# Altium PCB FMC_DAC_PSU.PcbDoc (part 1 of 3)
Units mil, origin at the board's own origin, x right, y up, seen from the top; angles counter-clockwise.
Board outline 748.03 x 2716.54 mil, 6 copper layers (TOP, G1, L2, L3, P4, BOTTOM), stack 50.473 mil thick; 122 components, 60 nets, 337 pads, 202 vias.
Unrouted connection lines stored in the file: 1.
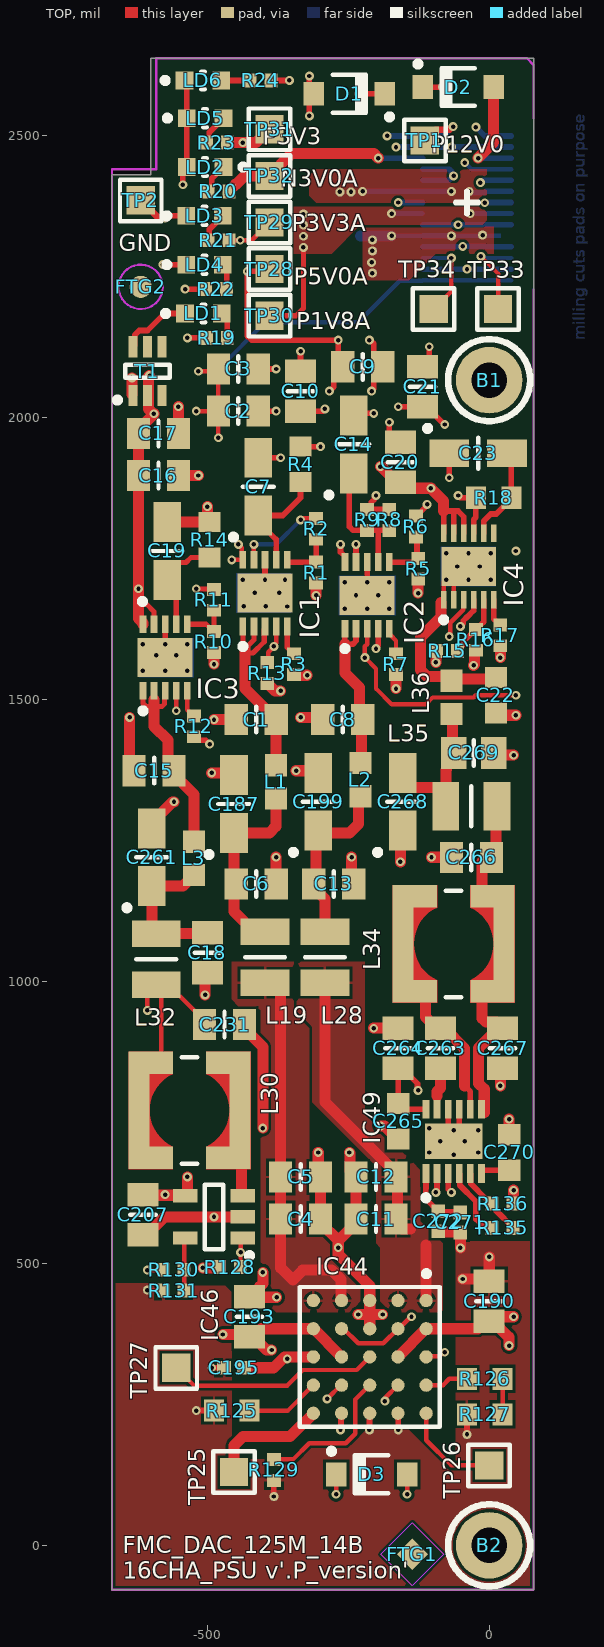
[diagram p0: TOP view]
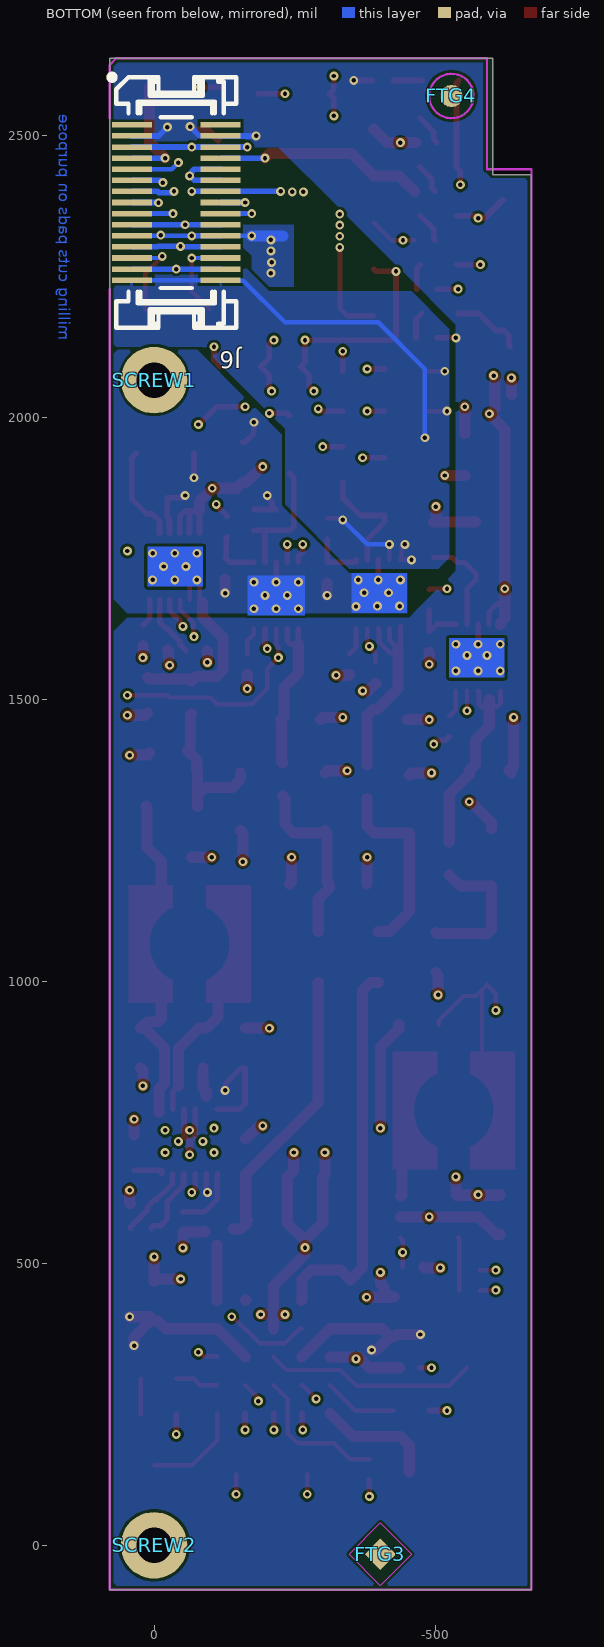
[diagram p1: BOTTOM view, seen from below]
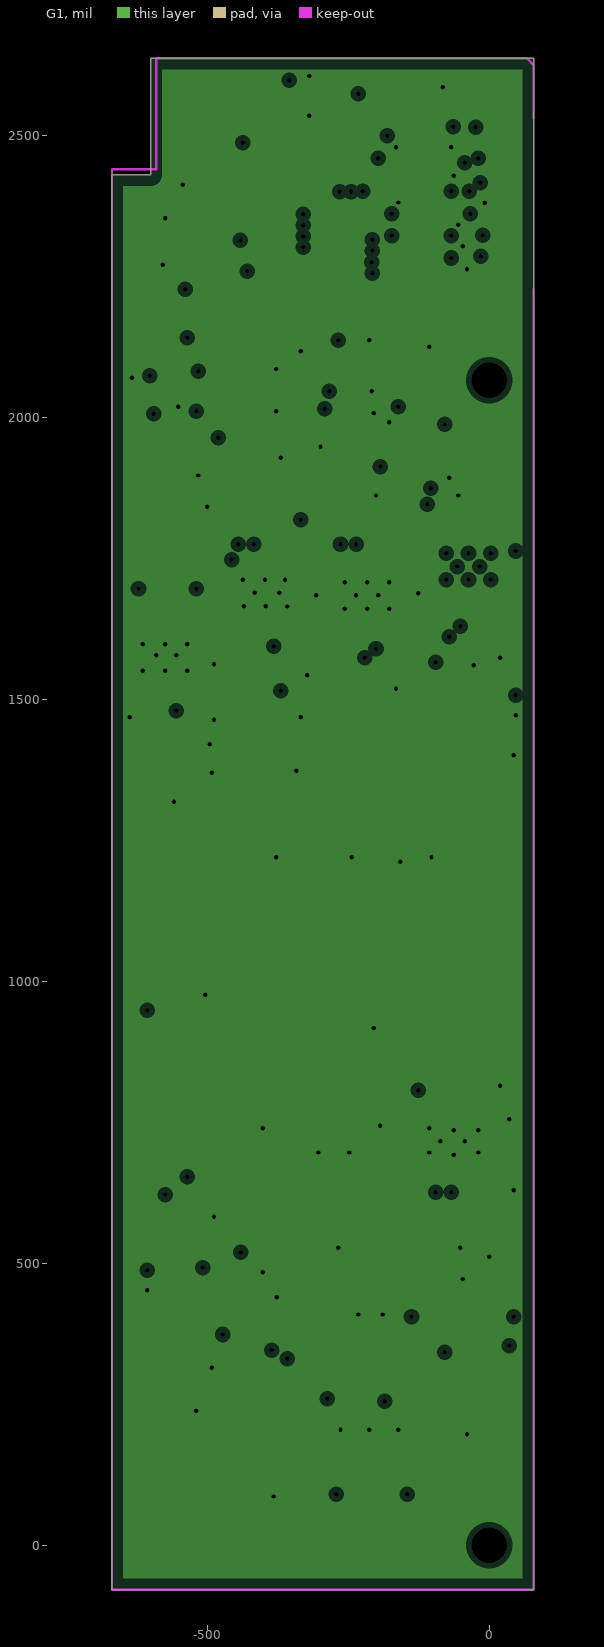
[diagram p2: G1, clearances drawn from the general rule]
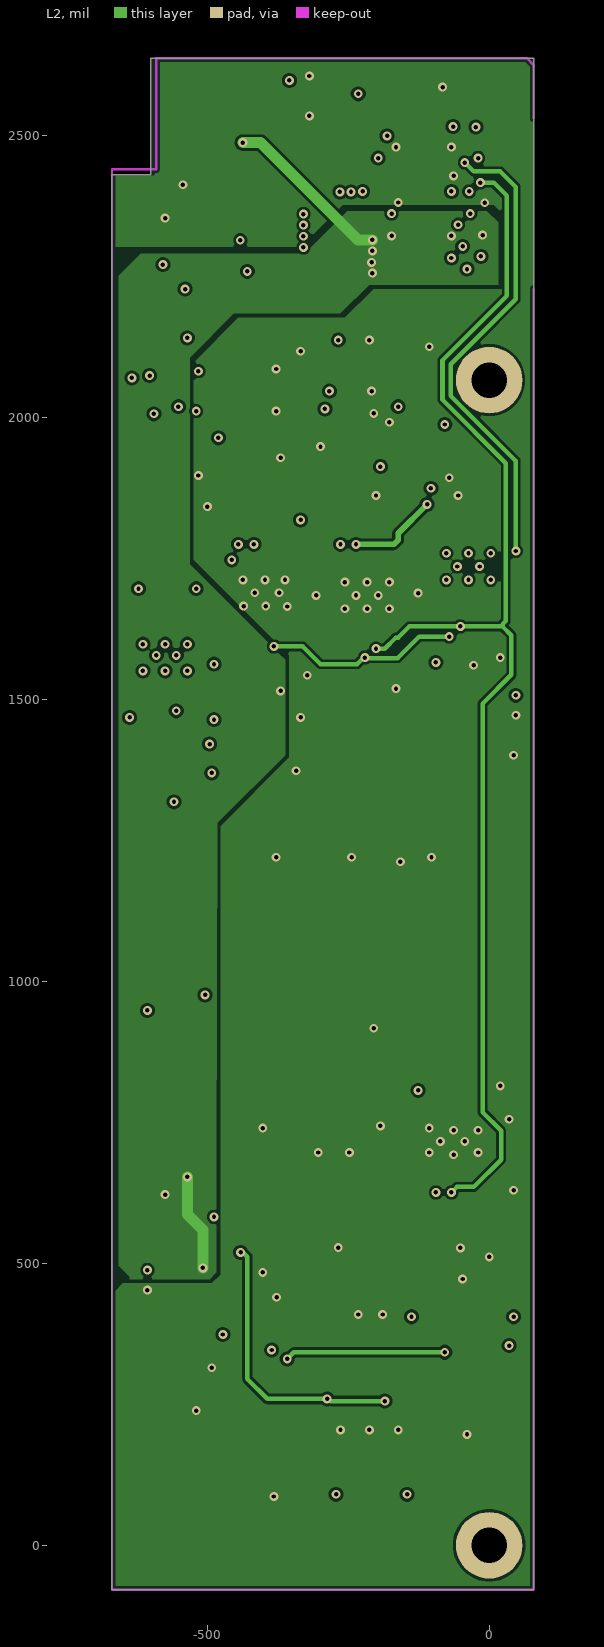
[diagram p3: L2]
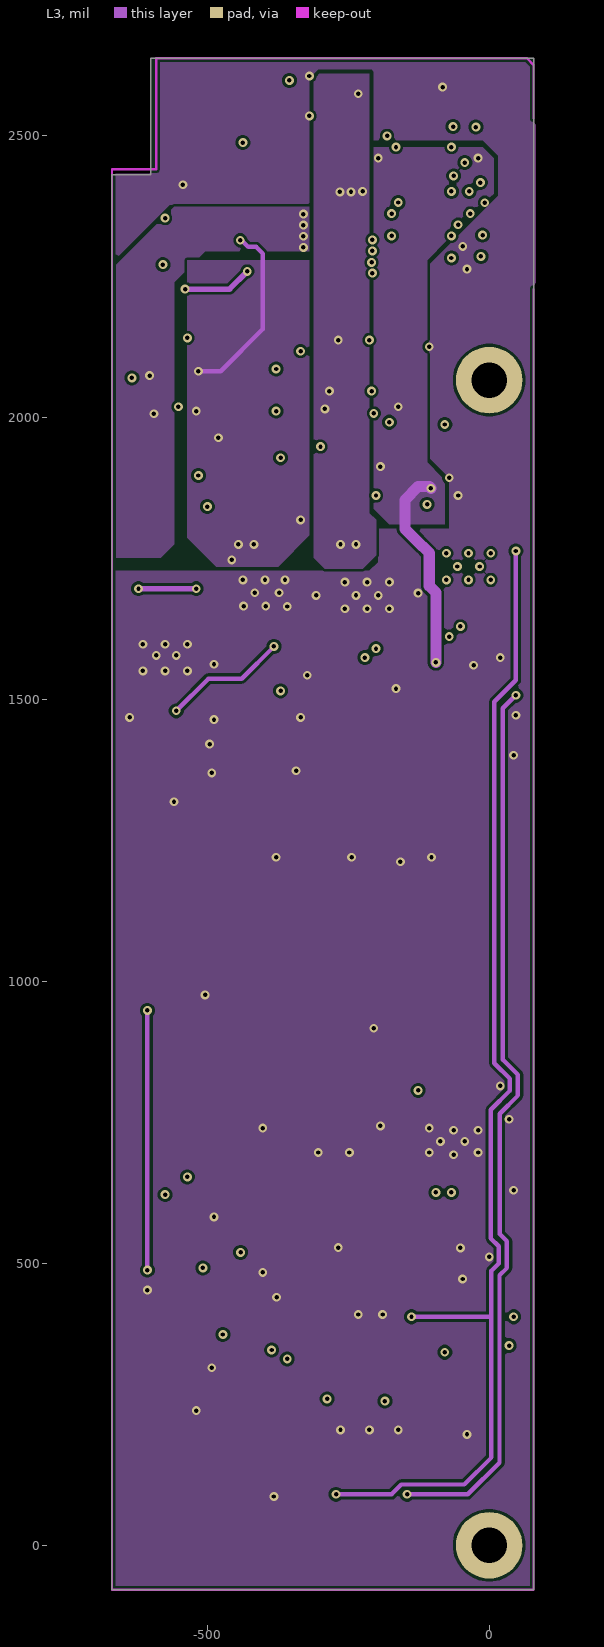
[diagram p4: L3]
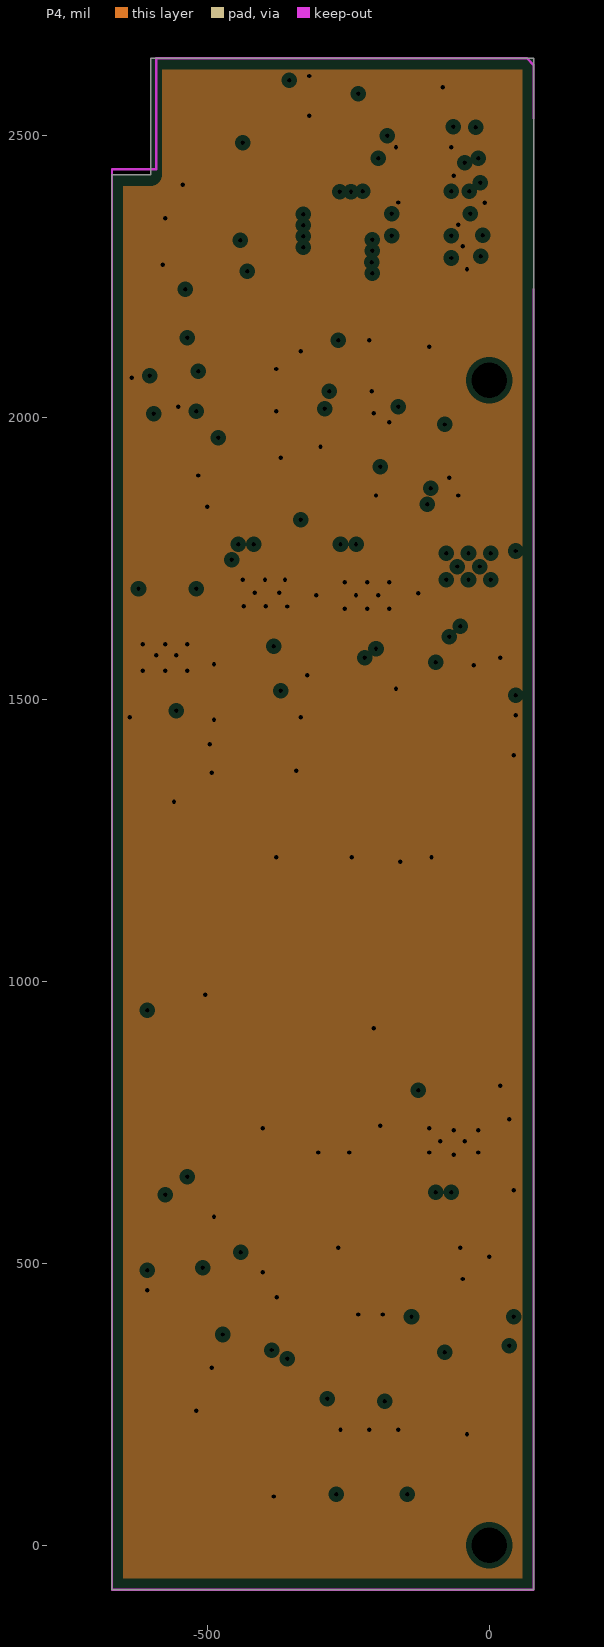
[diagram p5: P4, clearances drawn from the general rule]
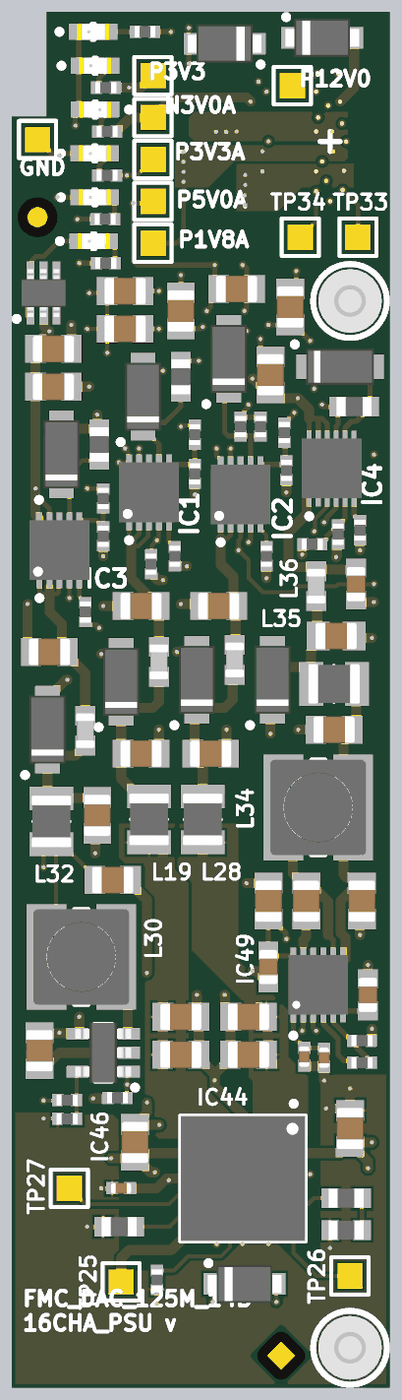
[diagram p7: 3D render of the assembled board from above, using the file's embedded part models]

## Layer stack, top to bottom
TopSolder: solder mask 0.3937, Solder Resist, Dk 3.5
TOP: signal copper 1.378
Dielectric1: prepreg 7.0866, FR-4, Dk 4.8
G1: plane copper 0.7087, net GND
Dielectric2: core 11.811, FR-4, Dk 4.8
L2: signal copper 0.7087
Dielectric 3: prepreg 7.0866, FR-4, Dk 4.8
L3: signal copper 0.7087
Dielectric 4: core 11.811, FR-4, Dk 4.8
P4: plane copper 0.7087, net GND
Dielectric5: prepreg 7.0866, FR-4, Dk 4.8
BOTTOM: signal copper 1.378
BottomSolder: solder mask 0.3937, Solder Resist, Dk 3.5

## Board outline
-669.29,-78.74 -669.29,2372.05 -669.29,2431.1 -600.39,2431.1 -600.39,2637.8 78.74,2637.8 78.74,-78.74

## Design rules (kind name [scope] priority, off if disabled: settings)
AcuteAngle [All] p1: minimum=4.50000000000000E+0001 checktracksonly=FALSE
AssemblyTestPointUsage [All] p1 off:
AssemblyTestpoint [All] p1 off: testpointundercomponent=TRUE minsize=40 maxsize=100 preferedsize=60 minholesize=0 maxholesize=40 preferedholesize=32 testpointgrid=1 usegrid=TRUE gridtolerance=0.01 allowsidetop=TRUE allowsidebottom=TRUE
Clearance [All] p1: gap=5 ignorepadtopadclearanceinfootprint=FALSE
ComponentClearance NO_DRC [InComponentClass('NO_DRC')] p1 off: gap=0 collisioncheckmode=3 verticalgap=100000 showdistances=FALSE
ComponentClearance [All] p2 off: gap=1 collisioncheckmode=3 verticalgap=100000 showdistances=FALSE
DiffPairsRouting [All] p1: maxlimit=12 minlimit=8 mostfreqgap=10 toplayer_minwidth=15 toplayer_maxwidth=15 toplayer_prefwidth=15 midlayer1_minwidth=15 midlayer1_maxwidth=15 midlayer1_prefwidth=15 midlayer2_minwidth=15 midlayer2_maxwidth=15 midlayer2_prefwidth=15 bottomlayer_minwidth=15 bottomlayer_maxwidth=15 bottomlayer_prefwidth=15 maxuncoupledlength=600
FabricationTestPointUsage TestPointUsage [All] p1 off: valid=0 allowmultiple=FALSE
FabricationTestpoint Testpoint [All] p1 off: side=3 testpointundercomponent=TRUE minsize=40 maxsize=100 preferedsize=60 minholesize=0 maxholesize=40 preferedholesize=32 testpointgrid=1 allowsidetop=TRUE allowsidebottom=TRUE usegrid=TRUE gridtolerance=0.01
FanoutControl Fanout_BGA [IsBGA] p1 off: bgadir=Out bgaviamode=Centered fanoutstyle=Auto fanoutdirection=Alternating viagrid=1 // Fanout_BGA (Default Rule)
FanoutControl Fanout_LCC [IsLCC] p2 off: bgadir=Out bgaviamode=Centered fanoutstyle=Auto fanoutdirection=Alternating viagrid=1 // Fanout_LCC (Default Rule)
FanoutControl Fanout_SOIC [IsSOIC] p3 off: bgadir=Out bgaviamode=Centered fanoutstyle=Auto fanoutdirection=Alternating viagrid=1 // Fanout_SOIC (Default Rule)
FanoutControl Fanout_Small [(CompPinCount < 5)] p4 off: bgadir=Out bgaviamode=Centered fanoutstyle=Auto fanoutdirection=OutThenIn viagrid=1 // Fanout_Small (Default Rule)
FanoutControl Fanout_Default [All] p5 off: bgadir=Out bgaviamode=Centered fanoutstyle=Auto fanoutdirection=Alternating viagrid=1 // Fanout_Default (Default Rule)
Height Height_Top [OnTop] p1 off: minheight=0 maxheight=370 prefheight=350
Height Height_Bot [OnBottom] p2 off: minheight=0 maxheight=58 prefheight=52
HoleSize [All] p1: absolutevalues=TRUE maxlimit=1000 minlimit=5.91 maxpercent=80.000 minpercent=20.000
HoleToHoleClearance [All] p1: gap=5 allowstackedmicrovias=TRUE
MinimumAnnularRing [All] p1: minimumring=3.94
MinimumSolderMaskSliver [All] p1 off: minsoldermaskwidth=1
PlaneClearance [All] p1: clearance=9.84
PlaneConnect Vias_Plane [IsVia] p1: planeconnectstyle=Direct reliefexpansion=20 reliefentries=4 reliefconductorwidth=10 reliefairgap=10
PlaneConnect [All] p2: planeconnectstyle=Relief reliefexpansion=8 reliefentries=4 reliefconductorwidth=10 reliefairgap=8
PolygonConnect Vias [IsVia] p1: connectstyle=Direct reliefconductorwidth=10 reliefentries=4 polygonreliefangle="90 Angle" airgapwidth=10
PolygonConnect [All] p2: thpad.connectstyle=Relief thpad.reliefconductorwidth=16 thpad.reliefentries=4 thpad.polygonreliefangle="90 Angle" thpad.airgapwidth=10 smdpad.connectstyle=Relief smdpad.reliefconductorwidth=5 smdpad.reliefentries=4 smdpad.polygonreliefangle="90 Angle" smdpad.airgapwidth=5 via.connectstyle=Direct via.reliefconductorwidth=16 via.reliefentries=4 via.polygonreliefangle="90 Angle" via.airgapwidth=10
RoomDefinition FMC_DAC_PSU [InComponentClass('FMC_DAC_PSU')] p1 off: confinementstyle=ConfineIn formatcopy=TRUE lockcomponents=FALSE outline -444.88,251.42 -614.17,251.42 -614.17,408.9 -444.88,408.9
RoutingCorners [All] p1 off: cornerstyle=45-Degree minsetback=100 maxsetback=100
RoutingLayers [All] p1 off: top layer_v5=TRUE mid layer 1_v5=TRUE mid layer 2_v5=TRUE bottom layer_v5=TRUE
RoutingVias [All] p1: holewidth=5.91 width=15.75 viastyle="Through Hole" minholewidth=5.91 minwidth=15.75 maxholewidth=118.11 maxwidth=196.85
ShortCircuit SMA_1 [InPadClass('SMA')] p2: allowed=TRUE
SilkToSilkClearance [All] p1 off: silktosilkclearance=2
SilkToSolderMaskClearance SilkscreenOverComponentPads [IsPad] p1 off: minsilkscreentomaskgap=2 clearancetoexposedcopper=TRUE
SolderMaskExpansion [All] p1: expansion=1 istentingtop=FALSE
ViasUnderSMD ViasUnderSMD_allow [HasFootprint('SON45P300X300X80-13N-R175X248') or  HasFootprint('SON50P300X300X80-11N-R175X248') or HasFootprint('SON50P300X300X80-13N-R160X260')] p1: allowed=TRUE
ViasUnderSMD [All] p2: allowed=FALSE
Width Width_1 [InNetClass('Buff_data')] p1 off: maxlimit=6.39 minlimit=3.74 preferedwidth=5.3 toplayer_minwidth=4.37 midlayer1_maxwidth=6.14 midlayer1_prefwidth=4.83 midlayer2_minwidth=3.86 midlayer2_maxwidth=6.32 midlayer2_prefwidth=4.98 bottomlayer_minwidth=4.37 minimp=45.000000 maximp=55.000000 favimp=50.000000
Width Width_3 [(InNet('RF1') OR InNet('RF2') OR InNet('RF3') OR InNet('RF4') OR InNet('RF5') OR InNet('RF6') OR InNet('RF7') OR InNet('EXT_CLK_IN'))] p2 off: maxlimit=5.72 minlimit=4.15 preferedwidth=5.3 toplayer_minwidth=4.73 midlayer1_maxwidth=5.33 midlayer1_prefwidth=4.83 midlayer2_minwidth=4.29 midlayer2_maxwidth=5.49 midlayer2_prefwidth=4.98 bottomlayer_minwidth=4.73 minimp=48.000000 maximp=53.000000 favimp=50.000000
Width Width_Pair_Diff [All] p3: maxlimit=19.68 minlimit=7.87 preferedwidth=11.81 checkconnectedcopper=TRUE
Width [All] p4: maxlimit=100 minlimit=3 preferedwidth=10 toplayer_maxwidth=20 midlayer2_maxwidth=20 minimp=45.000000 maximp=110.000000 favimp=100.000000 checkconnectedcopper=TRUE
9 further rules are at their usual default settings.

## Classes and differential pairs
pad class Direc: J3-37 J3-38
pad class SMA: J7-2

## Components (designator, comment, footprint, x,y, rotation, side; value= is the part's Value field where it differs from the comment)
B1 "Plated Hole" c300h160 0,2066.93 r0 top
B2 "Plated Hole" c300h160 0,0 r0 top
C1 "22uF" CAPC2012X135N -413.39,1464.57 r0 top
C2 "22uF" CAPC2012X135N -444.88,2011.81 r180 top
C3 "22uF" CAPC2012X135N -444.88,2086.61 r180 top
C4 "22uF" CAPC2012X135N -334.65,578.74 r180 top
C5 "22uF" CAPC2012X135N -334.65,653.54 r180 top
C6 "22uF" CAPC2012X135N -413.39,1173.23 r180 top
C7 "10uF" CAPMP3216X180N -409.45,1877.95 r90 top
C8 "22uF" CAPC2012X135N -259.84,1464.57 r0 top
C9 "22uF" CAPC2012X135N -224.41,2090.55 r180 top
C10 "22uF" CAPC2012X135N -334.65,2047.24 r270 top
C11 "22uF" CAPC2012X135N -200.79,578.74 r0 top
C12 "22uF" CAPC2012X135N -200.79,653.54 r0 top
C13 "22uF" CAPC2012X135N -275.59,1173.23 r180 top
C14 "10uF" CAPMP3216X180N -240.16,1952.76 r90 top
C15 "22uF" CAPC2012X135N -594.49,1374.02 r0 top
C16 "22uF" CAPC2012X135N -586.61,1897.64 r180 top
C17 "22uF" CAPC2012X135N -586.61,1972.44 r180 top
C18 "22uF" CAPC2012X135N -500,1051.18 r90 top
C19 "10uF" CAPMP3216X180N -570.87,1763.78 r90 top
C20 "22uF" CAPC2012X135N -157.48,1921.26 r270 top
C21 "22uF" CAPC2012X135N -118.11,2055.12 r270 top
C22 "1uF" CAPC1608X87N 11.81,1507.87 r90 top
C23 "10uF" CAPMP3216X180N -19.69,1937.01 r0 top
C187 "10uF" CAPMP3216X180N -452.76,1314.96 r90 top
C190 "22uF" CAPC2012X135N 0,433.07 r270 top
C193 "22uF" CAPC2012X135N -425.2,405.51 r270 top
C195 "100nF" CAPC1005X55N -452.76,314.96 r0 top
C199 "10uF" CAPMP3216X180N -303.15,1318.9 r90 top
C207 "22uF" CAPC2012X135N -614.17,586.61 r90 top
C231 "22uF" CAPC2012X135N -469.49,923.61 r180 top
C261 "10uF" CAPMP3216X180N -598.43,1220.47 r90 top
C263 "10uF" CAPC2012X135N -86.61,881.89 r90 top
C264 "22uF" CAPC2012X135N -161.42,881.89 r270 top
C265 "2.2uF" CAPC1608X87N -161.42,751.97 r90 top
C266 "22uF" CAPC2012X135N -31.5,1220.47 r0 top
C267 "22uF" CAPC2012X135N 23.62,881.89 r90 top
C268 "10uF" CAPMP3216X180N -153.54,1318.9 r90 top
C269 "47uF" CAPC2012X140N -27.56,1405.51 r180 top
C270 "1uF" CAPC1608X87N 35.43,696.85 r270 top
C271 "100nF" CAPC1005X55N -51.18,572.83 r90 top
C272 "100nF" CAPC1005X55N -90.55,574.8 r90 top
D1 "PMEG6020ER" SODFL3517X110N -248.03,2574.8 r180 top
D2 "PMEG6020ER" SODFL3517X110N -55.12,2586.61 r0 top
D3 "PMEG6020ER" SODFL3517X110N -208.66,125.98 r0 top
FTG1 "Use only in PCB" FIDUCIAL_TOP_S100-200 -136.25,-15.75 r90 top
FTG2 "Use only in PCB" FIDUCIAL_TOP_C100-200 -618.11,2232.28 r90 top
FTG3 "Use only in PCB" FIDUCIAL_TOP_S100-200 -401.57,-15.75 r90 bottom
FTG4 "Use only in PCB" FIDUCIAL_TOP_C100-200 -527.56,2570.87 r90 bottom
IC1 "LT3045EDD#PBF" SON50P300X300X80-11N-R175X248 -397.64,1688.98 r90 top
IC2 "LT3045EDD#PBF" SON50P300X300X80-11N-R175X248 -216.54,1685.04 r90 top
IC3 "LT3045EDD#PBF" SON50P300X300X80-11N-R175X248 -574.8,1574.8 r90 top
IC4 "LT3094EDD#PBF" SON45P300X300X80-13N-R175X248 -36.42,1736.22 r90 top
IC44 "LTM4622AEY#PBF" BGA25C127P5X5_625X625X262 -211.87,334.26 r270 top
IC46 "TLV62565DBVT" SOT95P280X145-5N -488.19,582.68 r180 top
IC49 "TPS63710DRR" SON50P300X300X80-13N-R160X260 -62.99,716.54 r90 top
J6 "SlimStack™" MOLEX_52991-0308 -39.37,2381.89 r270 bottom locked
L1 "120R@100MHz" INDC1608X65N -377.95,1354.33 r90 top
L2 "120R@100MHz" INDC1608X65N -228.35,1358.27 r90 top
L3 "120R@100MHz" INDC1608X65N -523.62,1218.5 r90 top
L19 "1uH" INDC2620X100N -397.64,1043.31 r90 top
L28 "1uH" INDC2620X100N -291.34,1043.31 r90 top
L30 "2.2uH" IND_WURTH_WE-TPC_4828 -531.5,771.65 r180 top
L32 "1uH" INDC2620X100N -590.55,1039.37 r90 top
L34 "2.2uH" IND_WURTH_WE-TPC_4828 -62.99,1066.93 r0 top
L35 "1uH" INDC2620X100N -31.5,1311.02 r180 top
L36 "120R@100MHz" INDC1608X65N -66.93,1503.94 r90 top
LD1 "Green" LED_KINGBRIGHT_KPH-1608CGCK -506.89,2185.04 r0 top
LD2 "Green" LED_KINGBRIGHT_KPH-1608CGCK -503.94,2444.88 r180 top
LD3 "Green" LED_KINGBRIGHT_KPH-1608CGCK -504.92,2358.27 r0 top
LD4 "Green" LED_KINGBRIGHT_KPH-1608CGCK -504.92,2271.65 r0 top
LD5 "Green" LED_KINGBRIGHT_KPH-1608CGCK -503.94,2531.5 r0 top
LD6 "Green" LED_KINGBRIGHT_KPH-1608CGCK -507.87,2598.43 r0 top
R1 "3k6" RESC1005X40N -307.09,1725.59 r90 top
R2 "33k" RESC1005X40N -307.09,1803.15 r90 top
R3 "330" RESC1005X40N -346.46,1562.99 r90 top
R4 "33k" RESC1608X55N -334.65,1917.32 r270 top
R5 "1k6" RESC1005X40N -125.98,1732.28 r90 top
R6 "22k" RESC1005X40N -129.92,1807.09 r90 top
R7 "100" RESC1005X40N -165.35,1562.99 r90 top
R8 "100k" RESC1005X40N -177.17,1818.9 r270 top
R9 "100k" RESC1005X40N -216.54,1818.9 r270 top
R10 "2k4" RESC1005X40N -488.19,1602.36 r90 top
R11 "10k" RESC1005X40N -488.19,1677.17 r90 top
R12 "330" RESC1005X40N -523.62,1452.76 r90 top
R13 "43k" RESC1005X40N -393.7,1547.24 r270 top
R14 "18k" RESC1608X55N -496.06,1783.46 r270 top
R15 "47k" RESC1005X40N -74.8,1586.61 r180 top
R16 "5k6" RESC1005X40N -23.62,1606.3 r90 top
R17 "10k" RESC1005X40N 19.69,1614.17 r90 top
R18 "30k" RESC1608X55N 7.87,1858.27 r180 top
R19 "27k" RESC1005X40N -483.07,2141.73 r180 top
R20 "2k4" RESC1005X40N -480.31,2401.57 r0 top
R21 "2k4" RESC1005X40N -480.31,2314.96 r0 top
R22 "3k6" RESC1005X40N -484.25,2228.35 r180 top
R23 "2k4" RESC1005X40N -483.07,2488.19 r0 top
R24 "27k" RESC1005X40N -405.51,2598.43 r0 top
R125 "11k8" RESC1608X55N -456.69,239.09 r180 top
R126 "5k62" RESC1608X55N -7.87,295.28 r0 top
R127 "1k78" RESC1608X55N -7.87,232.28 r180 top
R128 "10k" RESC1005X40N -459.92,493.61 r0 top
R129 "200k" RESC1005X40N -381.89,133.86 r90 top
R130 "51k" RESC1005X40N -559.56,489 r180 top
R131 "18k" RESC1005X40N -559.56,452 r0 top
R135 "150k" RESC1005X40N 23.62,562.99 r0 top
R136 "43k" RESC1005X40N 23.62,606.3 r0 top
SCREW1 "M1.6x4" BOSSARD_B1.6X4/BN660_v 0,2066.93 r90 bottom
SCREW2 "M1.6x4" BOSSARD_B1.6X4/BN660_v 0,0 r90 bottom
T1 "PMGD280UN" SOT65P210X110-6N -606.3,2082.68 r90 top
TP1 "Test Point" TPS127 -114.17,2492.13 r0 top
TP2 "Test Point" TPS127 -618.11,2385.83 r0 top
TP25 "Test Point" TPS127 -452.76,129.92 r270 top
TP26 "Test Point" TPS127 0,141.73 r270 top
TP27 "Test Point" TPS127 -555.12,314.96 r270 top
TP28 "Test Point" TPS127 -389.76,2263.78 r270 top
TP29 "Test Point" TPS127 -389.76,2346.46 r270 top
TP30 "Test Point" TPS127 -389.76,2181.1 r90 top
TP31 "Test Point" TPS127 -389.76,2511.81 r180 top
TP32 "Test Point" TPS127 -389.76,2429.13 r90 top
TP33 "Test Point" TPS127 15.75,2192.91 r180 top
TP34 "Test Point" TPS127 -98.43,2192.91 r0 top

## Footprints (in the part's own frame and the unit in brackets; to place one, negate y for a bottom-side part, rotate by r counter-clockwise, add the part's x,y. Pads: shape width x height; smd on the part's side, far side on the other; paste and mask are expansions set on the pad)
BGA25C127P5X5_625X625X262 [mm] "BGA, 1.27mm Pitch, Square; 25 Pin, 5 Columns X 5 Rows, 6.25mm X 6.25mm X 2.62mm H"
  round 0.6 smd: A1(-2.54,2.54) A2(-1.27,2.54) A3(0,2.54) A4(1.27,2.54) A5(2.54,2.54) B1(-2.54,1.27) B2(-1.27,1.27) B3(0,1.27) B4(1.27,1.27) B5(2.54,1.27) C1(-2.54,0) C2(-1.27,0) C3(0,0) C4(1.27,0) C5(2.54,0) D1(-2.54,-1.27) D2(-1.27,-1.27) D3(0,-1.27) D4(1.27,-1.27) D5(2.54,-1.27) E1(-2.54,-2.54) E2(-1.27,-2.54) E3(0,-2.54) E4(1.27,-2.54) E5(2.54,-2.54)
  silkscreen extent -3.87,-3.15 3.15,3.15, body extent -3.12,-3.12 3.13,3.13, height 2.62
BOSSARD_B1.6X4/BN660_v [mil] "M1.6 L=4mm Philips Head Machine Screw, DIN 7985A, Stainless Steel A2"
  body extent -63,-63 63,63, height 48
c300h160 [mm] "Plated Through Hole: Hole Dia.=1.6mm Pad Dia.=3mm"
  round 3 hole 1.6: 1(0,0)
  silkscreen extent -1.8,-1.8 1.8,1.8
CAPC1005X55N [mm] "Capacitor, Non-Polarized, Chip; 1.00mm L X 0.50mm W X 0.70mm H, IPC Medium Density"
  rect 0.62x0.62 smd: 1(-0.45,0) 2(0.45,0)
  body extent -0.52,-0.27 0.53,0.28, height 0.55
CAPC1608X87N [mm] "Chip Capacitor, Body 1.6x0.8mm IPC Medium Density"
  rect 0.95x1 smd: 1(-0.8,0) 2(0.8,0)
  body extent -0.87,-0.47 0.88,0.48, height 0.87
CAPC2012X135N [mm] "Chip Capacitor, Body 2.0x1.25mm, IPC Medium Density"
  rect 1.05x1.4 smd: 1(-0.9,0) 2(0.9,0)
  silkscreen extent 0,-0.58 0,0.58, body extent -1.05,-0.67 1.05,0.68, height 1.25
CAPC2012X140N [mm] "Chip Capacitor, Body 2.0x1.25mm, IPC Medium Density"
  rect 1.15x1.45 smd: 1(-0.9,0) 2(0.9,0)
  silkscreen extent 0,-0.58 0,0.58, body extent -1.05,-0.67 1.05,0.68, height 1.3
CAPMP3216X180N [mm] "Capacitor, Polarized, Molded  Body 3.2x1.6mm, IPC Medium Density"
  rect 1.8x1.25 smd: 1(-1.3,0) 2(1.3,0)
  silkscreen extent -2.4,-0.7 0,1.25, body extent -1.7,-0.9 1.7,0.9, height 1.6
FIDUCIAL_TOP_C100-200 [mm] "Round Fiducial Target, Top Layer, 1.0mm, Top Solder 2.0mm, Keepout =2.0mm"
  round 1 smd paste-0.51 mask+0.5: FTG2(0,0)
  TOP keep-out circle w0.1: c0,0 r1
FIDUCIAL_TOP_S100-200 [mm] "Square Fiducial Target, Top Layer, 1.0mm, Top Solder 2.0mm, Keepout =2.0mm"
  rect 1x1 smd rot 45 paste-0.51 mask+0.5: 1(0,0)
  TOP keep-out region: 1.414,0 0,-1.414 -1.414,0 0,1.414
IND_WURTH_WE-TPC_4828 [mm] "Shielded Tiny Power Inductor, Body 4.8x4.8mm"
  rect 0.95x5.3 smd: 1(-2.275,0) 2(2.275,0)
  rect 1.05x1.014 smd: 1(-1.275,2.143) 1(-1.275,-2.143) 2(1.275,2.143) 2(1.275,-2.143)
  TOP region: 2.75,-2.65 0.75,-2.65 0.75,-1.636 1.394,-1.138 1.753,-0.407 1.753,0.407 1.394,1.138 0.75,1.636 0.75,1.636 0.75,2.65 2.75,2.65
  TOP region: -2.75,-2.65 -0.75,-2.65 -0.75,-1.636 -1.394,-1.138 -1.753,-0.407 -1.753,0.407 -1.394,1.138 -0.75,1.636 -0.75,1.636 -0.75,2.65 -2.75,2.65
  TOP region: 0.75,-2.65 2.75,-2.65 2.75,2.65 0.75,2.65 0.75,1.636 1.394,1.138 1.753,0.407 1.753,-0.407 1.394,-1.138 0.75,-1.636 0.75,-1.636
  silkscreen extent -0.35,-2.4 0.35,2.4, body extent -2.4,-2.4 2.4,2.4, height 2.8
INDC1608X65N [mm] "Chip Inductor, 2-Leads, EIA 0603, Metric 1608, Body 1.6x0.8mm, IPC Medium Density"
  rect 1x1 smd: 1(-0.75,0) 2(0.75,0)
  body extent -0.87,-0.47 0.88,0.48, height 0.65
INDC2620X100N [mm] "Chip Inductor, EIA 1008, Metric 2520, Body 2.60mm L X 2.00mm W X 1.00mm H, IPC Medium Density"
  rect 1.2x2.2 smd: 1(-1.15,0) 2(1.15,0)
  silkscreen extent 0,-0.9 0,0.9, body extent -1.3,-1 1.3,1, height 1
LED_KINGBRIGHT_KPH-1608CGCK [mm] "SMT Green LED, Case 0603, Body L 1.6 x W 0.8mm H 0.65mm"
  rect 0.8x0.8 smd: 1(-0.825,0) 2(0.825,0)
  silkscreen extent -1.82,-0.4 0.08,0.4, body extent -0.8,-0.4 0.8,0.4, height 0.65
MOLEX_52991-0308 [mm] "0.50mm Pitch SlimStack™ Dual Row 30 Circuits Surface Mount Vertical Receptacle (3.00 and 4.00mm Stacking Heights)"
  rect 0.25x1.8 smd: 1(-3.5,-2) 2(-3.5,2) 3(-3,-2) 4(-3,2) 5(-2.5,-2) 6(-2.5,2) 7(-2,-2) 8(-2,2) 9(-1.5,-2) 10(-1.5,2) 11(-1,-2) 12(-1,2) 13(-0.5,-2) 14(-0.5,2) 15(0,-2) 16(0,2) 17(0.5,-2) 18(0.5,2) 19(1,-2) 20(1,2) 21(1.5,-2) 22(1.5,2) 23(2,-2) 24(2,2) 25(2.5,-2) 26(2.5,2) 27(3,-2) 28(3,2) 29(3.5,-2) 30(3.5,2)
  silkscreen extent -5.77,-3.01 5.65,2.7, body extent -5.65,-2.7 5.65,2.7, height 2.32
RESC1005X40N [mm] "Chip Resistor, EIA 0402, Metric 1005, Body 1.0x0.5mm, IPC Medium Density"
  rect 0.58x0.62 smd: 1(-0.47,0) 2(0.47,0)
  body extent -0.52,-0.27 0.53,0.28, height 0.4
RESC1608X55N [mm] "Chip Resistor, EIA 0603, Metric 1608, Body 1.6x0.8mm, IPC Medium Density"
  rect 0.9x1 smd: 1(-0.8,0) 2(0.8,0)
  body extent -0.87,-0.47 0.88,0.48, height 0.55
SODFL3517X110N [mm] "SODFL Diode (SOD123W); 2.60mm W X 1.70mm L X 1.10mm H body, IPC Medium Density"
  rect 0.92x1.08 smd: 1(-1.6,0) 2(1.6,0)
  silkscreen extent -1.93,-0.85 0.75,1.16, body extent -1.85,-0.95 1.85,0.95, height 1.1
SON45P300X300X80-13N-R175X248 [mm] "SON, 0.45mm Pitch; 12 Pin, 3.00mm W X 3.00mm L X 0.80mm H Body (w/Thermal tab 1.75 x 2.48mm), IPC Medium Density"
  rect 0.8x0.25 smd: 1(-1.5,1.125) 2(-1.5,0.675) 3(-1.5,0.225) 4(-1.5,-0.225) 5(-1.5,-0.675) 6(-1.5,-1.125) 7(1.5,-1.125) 8(1.5,-0.675) 9(1.5,-0.225) 10(1.5,0.225) 11(1.5,0.675) 12(1.5,1.125)
  rect 1.75x2.45 smd paste-0.37: 13(0,0)
  silkscreen extent -2.52,1 -2.28,1.25, body extent -1.5,-1.5 1.5,1.5, height 0.8
SON50P300X300X80-11N-R175X248 [mm] "SON, 0.50mm Pitch; 10-pin, 3.00mm W  X 3.00mm L X 0.80mm H Body, (w/thermal tab 1.75 X 2.48 mm), IPC Medium Density"
  rect 0.8x0.3 smd: 1(-1.5,1) 2(-1.5,0.5) 3(-1.5,0) 4(-1.5,-0.5) 5(-1.5,-1) 6(1.5,-1) 7(1.5,-0.5) 8(1.5,0) 9(1.5,0.5) 10(1.5,1)
  rect 1.75x2.48 smd: 11(0,0)
  silkscreen extent -2.52,0.87 -2.28,1.12, body extent -1.5,-1.5 1.5,1.5, height 0.8
SON50P300X300X80-13N-R160X260 [mm] "SON, 0.50mm Pitch, 12-Pin, 3.00mm W  X 3.00mm L X 0.80mm Height, (w/Thermal Tab 1.6 X 2.6 mm), IPC Medium Density"
  rect 0.85x0.3 smd: 1(-1.45,1.25) 2(-1.45,0.75) 3(-1.45,0.25) 4(-1.45,-0.25) 5(-1.45,-0.75) 6(-1.45,-1.25) 7(1.45,-1.25) 8(1.45,-0.75) 9(1.45,-0.25) 10(1.45,0.25) 11(1.45,0.75) 12(1.45,1.25)
  rect 1.6x2.6 smd: 13(0,0)
  silkscreen extent -2.66,1.12 -2.42,1.37, body extent -1.5,-1.5 1.5,1.5, height 0.8
SOT65P210X110-6N [mm] "SOT363, SC70-6, SOT, 0.65mm Pitch, 6 Pin, 1.25mm W X 2.00mm L X 1.10mm H, IPC Medium Density"
  rect 0.95x0.4 smd: 1(-1.1,0.65) 2(-1.1,0) 3(-1.1,-0.65) 4(1.1,-0.65) 5(1.1,0) 6(1.1,0.65)
  silkscreen extent -1.42,-1 0.3,1.47, body extent -1.2,-1.1 1.2,1.1, height 1.1
SOT95P280X145-5N [mm] "SOT, 0.95mm pitch; 5 pin, 1.60mm W X 2.90mm L X 1.45mm H body, IPC Medium Density"
  rect 1.1x0.6 smd: 1(-1.3,0.95) 2(-1.3,0) 3(-1.3,-0.95) 4(1.3,-0.95) 5(1.3,0.95)
  silkscreen extent -1.73,-1.45 0.43,1.87, body extent -1.4,-1.5 1.4,1.5, height 1.45
TPS127 [mil] "1.27 x  1.27mm SMD Test Point Area"
  rect 50x50 smd paste-50: 1(0,0)
  silkscreen extent -37,-37 37,37

## Part data
B1 B2: library part PLATED_HOLE1.6_PAD3.0, "Single Terminal Socket", Author="CERN DEM JMW", ComponentHeight=0mm, Component Type="Standard (No BOM)", CreateDate=05.11.2009, Family="Plated Hole", HelpURL=Undefined, LatestRevisionDate=05.11.2009, Mounted=No, PackageDescription="Plated Through Hole: Hole Dia.=1.6mm Pad Dia.=3.0mm", Part Description="Plated Through Hole: Hole Dia.=1.6mm Pad Dia.=3.0mm", Part Number=PLATED_HOLE1.6_PAD3.0, Pin Count=1, Sense=No, SMD=No, Socket=No, Status=None
C1 C2 C3 C4 C5 C6 C8 C9 C10 C11 C12 C13 C15 C16 C17 C18 C20 C21 C190 C193 C207 C231 C264 C266 C267: library part CC0805_22UF_16V_10%_X5R, "Non-polarised capacitor", Case=0805, Manufacturer=GENERIC, Manufacturer1 ComponentHeight=1.35mm, Manufacturer1 Example=TDK, Manufacturer1 Part Number=C2012X5R1C226KT, Tolerance=±10%, Voltage=16V, Author="CERN DEM JLC", Component Type=Standard, CreateDate=25.10.2012, HelpURL=\\cern.ch\dfs\Applications\Altium\Datasheets\CC0805_X5R_TDK_C.pdf, LatestRevisionDate=25.10.2012, Manufacturer Part Number=CC0805_22UF_16V_10%_X5R, Mounted=Yes, Part Description="SMD Multilayer Chip Ceramic Capacitor", Part Number=CC0805_22UF_16V_10%_X5R, Pin Count=2, Sense=No, SMD=Yes, Socket=No, Status=Preferred, TC=X5R
C7 C14 C19 C23: library part CTE3216-18_10UF_16V_20%_AVX_TCJ, "Polarised capacitor", Case=A, Manufacturer=AVX, Manufacturer Part Number=TCJA106M016R0200, Tolerance=±20%, Voltage=16V, Author="CERN DEM JLC", Component Type=Standard, ComponentHeight=1.8mm, CreateDate=29.03.2012, HelpURL=\\cern.ch\dfs\Applications\Altium\Datasheets\CTE_AVX_TCJ.pdf, LatestRevisionDate=29.03.2012, Mounted=Yes, Part Description="ESR 0R200 Tantalum Solid Electrolytic Chip Capacitor with Conductive Polymer Electrode", Part Number=CTE3216-18_10UF_16V_20%_AVX_TCJ, Pin Count=2, Sense=No, SMD=Yes, Socket=No, Status=Preferred
C22: library part CC0603_1UF_25V_10%_X7R, "Non-polarised capacitor", Case=0603, Manufacturer=GENERIC, Manufacturer1 ComponentHeight=0.9mm, Manufacturer1 Example=MURATA, Manufacturer1 Part Number=GRM188R71E105KA12D, Tolerance=±10%, Voltage=25V, Author="CERN DEM JLC", Component Type=Standard, CreateDate=18.01.2011, HelpURL=\\cern.ch\dfs\Applications\Altium\Datasheets\CC0603_X7R_MURATA.pdf, LatestRevisionDate=18.01.2011, Manufacturer Part Number=CC0603_1UF_25V_10%_X7R, Mounted=Yes, Part Description="SMD Multilayer Chip Ceramic Capacitor", Part Number=CC0603_1UF_25V_10%_X7R, Pin Count=2, Sense=No, SMD=Yes, Socket=No, Status=None, TC=X7R
C187 C199 C261 C268: library part CTE3216-18_10UF_10V_10%_LESR1800, "Polarised capacitor", Case=A, Manufacturer=GENERIC, Manufacturer1 ComponentHeight=1.8mm, Manufacturer1 Example=AVX, Manufacturer1 Part Number=TPSA106K010R1800, Tolerance=±10%, Voltage=10V, Author="CERN DEM JLC", Component Type=Standard, CreateDate=05.05.2008, HelpURL=\\cern.ch\dfs\Applications\Altium\Datasheets\CTE-LESR_AVX_TPS.pdf, LatestRevisionDate=20.01.2009, Manufacturer Part Number=CTE3216-18_10UF_10V_10%_LESR1800, Mounted=Yes, Part Description="Low ESR 1R8 Solid Tantalum Chip Capacitor", Part Number=CTE3216-18_10UF_10V_10%_LESR1800, Pin Count=2, Sense=No, SMD=Yes, Socket=No, Status=Preferred
C195 C271 C272: library part CC0402_100NF_16V_10%_X5R, "Non-polarised capacitor", Case=0402, Manufacturer=GENERIC, Manufacturer1 ComponentHeight=0.55mm, Manufacturer1 Example=MURATA, Manufacturer1 Part Number=GRM155R61C104KA88D, Tolerance=±10%, Voltage=16V, Author="CERN DEM JLC", Component Type=Standard, CreateDate=10.12.2013, HelpURL=\\cern.ch\dfs\Applications\Altium\Datasheets\CC0402_X5R_MURATA_GRM.pdf, LatestRevisionDate=10.12.2013, Manufacturer Part Number=CC0402_100NF_16V_10%_X5R, Mounted=Yes, Part Description="SMD Multilayer Chip Ceramic Capacitor", Part Number=CC0402_100NF_16V_10%_X5R, Pin Count=2, Sense=No, SMD=Yes, Socket=No, Status=None, TC=X5R
C263: library part CC0805_10UF_16V_10%_X5R, "Non-polarised capacitor", Case=0805, Manufacturer=GENERIC, Manufacturer1 ComponentHeight=1.4mm, Manufacturer1 Example=KEMET, Manufacturer1 Part Number=C0805C106K4PAC, Tolerance=±10%, Voltage=16V, Author="CERN DEM JLC", Component Type=Standard, CreateDate=03.12.2007, HelpURL=\\cern.ch\dfs\Applications\Altium\Datasheets\CC1206_X5R_KEMET.pdf, LatestRevisionDate=03.12.2007, Manufacturer Part Number=CC0805_10UF_16V_10%_X5R, Mounted=Yes, Part Description="SMD Multilayer Chip Ceramic Capacitor", Part Number=CC0805_10UF_16V_10%_X5R, Pin Count=2, Sense=No, SMD=Yes, Socket=No, Status=Preferred, TC=X5R
C265: library part CC0603_2.2UF_16V_10%_X5R, "Non-polarised capacitor", Case=0603, Manufacturer=GENERIC, Manufacturer1 ComponentHeight=0.9mm, Manufacturer1 Example=YAGEO, Manufacturer1 Part Number=CC0603KRX5R7BB225, Tolerance=±10%, Voltage=16V, Author="CERN DEM JLC", Component Type=Standard, CreateDate=28.04.2011, HelpURL=\\cern.ch\dfs\Applications\Altium\Datasheets\CC0805_X5R_PHYCOMP_HC.pdf, LatestRevisionDate=28.04.2011, Manufacturer Part Number=CC0603_2.2UF_16V_10%_X5R, Mounted=Yes, Part Description="SMD Multilayer Chip Ceramic Capacitor", Part Number=CC0603_2.2UF_16V_10%_X5R, Pin Count=2, Sense=No, SMD=Yes, Socket=No, Status=Preferred, TC=X5R
C269: library part CC0805_47UF_6.3V_20%_X5R, "Non-polarised capacitor", Case=0805, Manufacturer=GENERIC, Manufacturer1 ComponentHeight=1.4mm, Manufacturer1 Example=KEMET, Manufacturer1 Part Number=C0805C476M9PACTU, Tolerance=±20%, Voltage=6.3V, Author="CERN DEM JLC", Component Type=Standard, CreateDate=16.10.2012, HelpURL=\\cern.ch\dfs\Applications\Altium\Datasheets\CC0805_X5R_KEMET.pdf, LatestRevisionDate=16.10.2012, Manufacturer Part Number=CC0805_47UF_6.3V_20%_X5R, Mounted=Yes, Part Description="SMD Multilayer Chip Ceramic Capacitor", Part Number=CC0805_47UF_6.3V_20%_X5R, Pin Count=2, Sense=No, SMD=Yes, Socket=No, Status=Preferred, TC=X5R
C270: library part CC0603_1UF_16V_10%_X7R, "Non-polarised capacitor", Case=0603, Manufacturer=GENERIC, Manufacturer1 ComponentHeight=0.9mm, Manufacturer1 Example="YAGEO PHYCOMP", Manufacturer1 Part Number=223878615663, Manufacturer Part Number=CC0603_1uF_16V_10%_X7R, Tolerance=±10%, Voltage=16V, Author="CERN DEM JLC", Component Type=Standard, CreateDate=03.12.2007, HelpURL=\\cern.ch\dfs\Applications\Altium\Datasheets\CC0603_X7R_PHYCOMP.pdf, LatestRevisionDate=17.04.2015, Mounted=Yes, Part Description="SMD Multilayer Chip Ceramic Capacitor", Part Number=CC0603_1UF_16V_10%_X7R, Pin Count=2, Sense=No, SMD=Yes, Socket=No, Status=None, TC=X7R
D1 D2 D3: "Schottky Diode", Case=SOD123, Manufacturer="NXP SEMICONDUCTORS", Power=2A, Voltage=60V, Author="CERN DEM JMW", Bonding=No, Component Type=Standard, ComponentHeight=0.65mm, CreateDate=19.06.2014, Device=PMEG6020ER, HelpURL=\\cern.ch\dfs\Applications\Altium\Datasheets\PMEG6020ER.pdf, LatestRevisionDate=19.06.2014, Manufacturer Part Number=PMEG6020ER, Mounted=Yes, PackageDescription="SODFL Diode (SOD123W); 2.60mm W X 1.70mm L X 1.10mm H body, IPC Medium Density", Part Description="MEGA Schottky Barrier Rectifier", Part Number=PMEG6020ER, Pin Count=2, PressFit=No, Sense=No, SMD=Yes, Socket=No
FTG1 FTG3: library part FIDUCIAL_TARGET_S100-200, "Fiducial Target", Author="CERN DEM JLC", Component Type="Standard (No BOM)", ComponentHeight=0mm, CreateDate=9/2/2010, Family=Fiducial, LatestRevisionDate=4/4/2012, Mounted=No, PackageDescription="Square Fiducial Target, Top Layer, 1.0mm, Top Solder 2.0mm, Keepout =2.0mm", Part Description="Square Fiducial Target, Top Layer, 1.0mm, Top Solder 2.0mm, Keepout =2.0mm", Part Number=FIDUCIAL_TARGET_S100-200, Pin Count=1, SMD=Yes, Socket=No, Status=None, Table=Pads
FTG2 FTG4: library part FIDUCIAL_TARGET_C100-200, "Fiducial Target", Author="CERN DEM JLC", Component Type="Standard (No BOM)", ComponentHeight=0mm, CreateDate=09.02.2010, Family=Fiducial, HelpURL=Undefined, LatestRevisionDate=04.04.2012, Mounted=No, PackageDescription="Round Fiducial Target, Top Layer, 1.0mm, Top Solder 2.0mm, Keepout =2.0mm", Part Description="Round Fiducial Target, Top Layer, 1.0mm, Top Solder 2.0mm, Keepout =2.0mm", Part Number=FIDUCIAL_TARGET_C100-200, Pin Count=1, Sense=No, SMD=Yes, Socket=No, Status=None
IC1 IC2 IC3: "20V, 500mA, Ultralow Noise, Ultrahigh PSRR Linear Regulator", Case=SON10, Manufacturer="LINEAR TECHNOLOGY", Author="CERN DEM JLC", Bonding=No, Component Type=Standard, ComponentHeight=0.8mm, CreateDate=07.12.2016, Device=LT3045EDD#PBF, HelpURL=\\cern.ch\dfs\Applications\Altium\Datasheets\LT3045EDD#PBF.pdf, LatestRevisionDate=07.12.2016, Manufacturer Part Number=LT3045EDD#PBF, Mounted=Yes, PackageDescription="SON, 0.50mm Pitch; 10-pin, 3.00mm W  X 3.00mm L X 0.80mm H Body, (w/thermal tab 1.75 X 2.48 mm), IPC Medium Density", Part Description="20V, 500mA, Ultralow Noise, Ultrahigh PSRR Linear Regulator", Part Number=LT3045EDD#PBF, Pin Count=11, PressFit=No, Sense=No, SMD=Yes, Socket=No
IC4: "-20V, 500mA, Ultralow Noise, Ultrahigh PSRR Negative Linear Regulator", Case=SON12, Manufacturer="LINEAR TECHNOLOGY", Author="CERN DEM JLC", Bonding=No, Component Type=Standard, ComponentHeight=0.8mm, CreateDate=12.11.2018, Device=LT3094EDD#PBF, HelpURL=\\cern.ch\dfs\Applications\Altium\Datasheets\LT3094EDD#PBF.pdf, LatestRevisionDate=12.11.2018, Manufacturer Part Number=LT3094EDD#PBF, Mounted=Yes, PackageDescription="SON, 0.45mm Pitch; 12 Pin, 3.00mm W X 3.00mm L X 0.80mm H Body (w/Thermal tab 1.75 x 2.48mm), IPC Medium Density", Part Description="-20V, 500mA, Ultralow Noise, Ultrahigh PSRR Negative Linear Regulator", Part Number=LT3094EDD#PBF, Pin Count=13, PressFit=No, Sense=No, SMD=Yes, Socket=No
IC44: "3.6V-20V To 1.5V-12V, Dual 2A or Single 4A  Ultrathin Step-Down DC/DC µModule Regulator", Case=BGA25, Manufacturer="LINEAR TECHNOLOGY", Author="CERN DEM MR", Bonding=No, ComponentHeight=2.62mm, Component Type=Standard, CreateDate=29.09.2017, Device=LTM4622AEY#PBF, HelpURL=\\cern.ch\dfs\Applications\Altium\Datasheets\LTM4622AEY#PBF.pdf, LatestRevisionDate=29.09.2017, Manufacturer Part Number=LTM4622AEY#PBF, Mounted=Yes, PackageDescription="BGA, 1.27mm Pitch, Square; 25 Pin, 5 Columns X 5 Rows, 6.25mm X 6.25mm X 2.62mm H", Part Description="3.6V-20V To 1.5V-12V, Dual 2A or Single 4A  Ultrathin Step-Down DC/DC uModule Regulator", Part Number=LTM4622AEY#PBF, Pin Count=25, PressFit=No, Sense=No, SMD=Yes, Socket=No
IC46: "1.5A High Efficiency Step-Down Converter, Adjustable Output Voltage", Case=SOT23-5, Manufacturer="TEXAS INSTRUMENTS", Author="CERN DEM JMW", Bonding=No, ComponentHeight=1.45mm, Component Type=Standard, CreateDate=29.08.2016, Device=TLV62565DBVT, HelpURL=\\cern.ch\dfs\Applications\Altium\Datasheets\TLV62565DBVT.pdf, LatestRevisionDate=29.08.2016, Manufacturer Part Number=TLV62565DBVT, Mounted=Yes, PackageDescription="SOT, 0.95mm Pitch; 5 Pin, 1.60mm W X 2.90mm L X 1.45mm H Body, IPC Medium Density", Part Description="1.5A High Efficiency Step-Down Converter, Adjustable Output Voltage", Part Number=TLV62565DBVT, Pin Count=5, PressFit=No, Sense=No, SMD=Yes, Socket=No
IC49: "-1 to -5.5VDC, 1A Output, Low Noise Synchronous Inverting Buck Converter", Case=SON12, Manufacturer="TEXAS INSTRUMENTS", Author="CERN DEM BC", Bonding=No, ComponentHeight=0.8mm, Component Type=Standard, CreateDate=11.02.2019, Device=TPS63710DRR, HelpURL=\\cern.ch\dfs\Applications\Altium\Datasheets\TPS63710DRR.pdf, LatestRevisionDate=11.02.2019, Manufacturer Part Number=TPS63710DRR, Mounted=Yes, PackageDescription="SON, 0.50mm Pitch, 12-Pin, 3.00mm W  X 3.00mm L X 0.80mm Height, (w/Thermal Tab 1.6 X 2.6 mm), IPC Medium Density", Part Description="-1 to -5.5VDC, 1A Output, Low Noise Synchronous Inverting Buck Converter", Part Number=TPS63710DRR, Pin Count=13, PressFit=No, Sense=No, SMD=Yes, Socket=No
J6: library part MOLEX_52991-0308, "Connector 30 Female", Manufacturer=MOLEX, Manufacturer Part Number=52991-0308, Author="CERN DEM JLC", ComponentHeight=2.27mm, Component Type=Standard, CreateDate=28.08.2012, Family=SlimStack™, HelpURL=\\cern.ch\dfs\Applications\Altium\Datasheets\MOLEX_52991-0308.pdf, LatestRevisionDate=28.08.2012, Mounted=Yes, Part Description="0.50mm Pitch SlimStack™ Dual Row 30 Circuits Surface Mount Vertical Receptacle (3.00 and 4.00mm Stacking Heights)", Part Number=MOLEX_52991-0308, Pin Count=30, PressFit=No, Sense=No, SMD=Yes, Socket=No, Status=None
L1 L2 L3 L36: library part IND0603_MURATA_BLM18SG121TN1D, "Inductor", Case=0603, Manufacturer=MURATA, Manufacturer Part Number=BLM18SG121TN1D, Power=3A, Resistance=0.025R, Tolerance=±25%, Author="CERN DEM JLC", Component Type=Standard, ComponentHeight=0.65mm, CreateDate=23.07.2014, HelpURL=\\cern.ch\dfs\Applications\Altium\Datasheets\IND0603_MURATA_BLM18S.pdf, LatestRevisionDate=23.07.2014, Mounted=Yes, Part Description="SMD EMIFIL Suppression Chip Ferrite Bead", Part Number=IND0603_MURATA_BLM18SG121TN1D, Pin Count=2, Sense=No, SMD=Yes, Socket=No, Status=None
L19 L28 L32 L35: library part IND1008_1UH_20%_WURTH_74479787210B, "Inductor", Case=1008, Manufacturer="WURTH ELEKTRONIK", Manufacturer Part Number=74479787210B, Power=1.95A, Resistance=0.06R, Tolerance=±20%, Author="CERN DEM JLC", ComponentHeight=1mm, Component Type=Standard, CreateDate=01.10.2014, HelpURL=\\cern.ch\dfs\Applications\Altium\Datasheets\IND_WURTH_WE-PMI_74479787210B.pdf, LatestRevisionDate=01.10.2014, Mounted=Yes, Part Description="Power Multilayer Inductor (WE-PMI Series)", Part Number=IND1008_1UH_20%_WURTH_74479787210B, Pin Count=2, Sense=No, SMD=Yes, Socket=No, Status=None
L30 L34: library part IND_2.2UH_30%_WURTH_WE-TPC_7440430022, "Inductor With Core", Manufacturer="WURTH ELEKTRONIK", Manufacturer Part Number=7440430022, Power=2.5A, Resistance=0.023R, Tolerance=±30%, Author="CERN DEM JLC", ComponentHeight=3mm, Component Type=Standard, CreateDate=19.11.2012, HelpURL=\\cern.ch\dfs\Applications\Altium\Datasheets\IND_WURTH_WE-TPC_7440430022.pdf, LatestRevisionDate=19.11.2012, Mounted=Yes, Part Description="Shielded Tiny Power Inductor (WE-TPC Series)", Part Number=IND_2.2UH_30%_WURTH_WE-TPC_7440430022, Pin Count=2, Sense=No, SMD=Yes, Socket=No, Status=None
LD1 LD2 LD3 LD4 LD5 LD6: library part LED_KINGBRIGHT_KPH-1608CGCK, "LED Green 1C 2A", Manufacturer=KINGBRIGHT, Manufacturer Part Number=KPH-1608CGCK, Author="CERN DEM JLC", Bonding=No, Color=Green, Component Type=Standard, ComponentHeight=0.65mm, CreateDate=03.07.2017, HelpURL=\\cern.ch\dfs\Applications\Altium\Datasheets\LED_KINGBRIGHT_KPH-1608CGCK.pdf, LatestRevisionDate=03.07.2017, Mounted=Yes, PackageDescription="SMT Green LED, Case 0603, Body L 1.6 x W 0.8mm H 0.65mm", Part Description="SMD Green LED, Case 1.6mmX0.8mm(0603), 0.65mm Thickness", Part Number=LED_KINGBRIGHT_KPH-1608CGCK, Pin Count=2, PressFit=No, Sense=No, SMD=Yes, Socket=No
R1 R22: library part R0402_3K6_1%_0.0625W_100PPM, "Resistor - 1%", Case=0402, Manufacturer=GENERIC, Manufacturer1 ComponentHeight=0.4mm, Manufacturer1 Example="YAGEO PHYCOMP", Manufacturer1 Part Number=232270673602L, Power=0.0625W, Tolerance=±1%, Author="CERN DEM JLC", Component Type=Standard, CreateDate=03/12/2007, HelpURL=\\cern.ch\dfs\Applications\Altium\Datasheets\R0402_Phycomp_RC0402.pdf, LatestRevisionDate=17/10/2012, Manufacturer Part Number=R0402_3K6_1%_0.0625W_100PPM, Mounted=Yes, Part Description="General Purpose Thick Film Chip Resistor", Part Number=R0402_3K6_1%_0.0625W_100PPM, Pin Count=2, PressFit=No, Sense=No, SMD=Yes, Socket=No, Status="Not Recommended", TC=±100ppm/°C
R2: library part R0402_33K_1%_0.0625W_100PPM, "Resistor - 1%", Case=0402, Manufacturer=GENERIC, Manufacturer1 ComponentHeight=0.4mm, Manufacturer1 Example="YAGEO PHYCOMP", Manufacturer1 Part Number=232270673303L, Power=0.0625W, Tolerance=±1%, Author="CERN DEM JLC", Component Type=Standard, CreateDate=03.12.2007, HelpURL=\\cern.ch\dfs\Applications\Altium\Datasheets\R0402_Phycomp_RC0402.pdf, LatestRevisionDate=17.10.2012, Manufacturer Part Number=R0402_33K_1%_0.0625W_100PPM, Mounted=Yes, Part Description="General Purpose Thick Film Chip Resistor", Part Number=R0402_33K_1%_0.0625W_100PPM, Pin Count=2, PressFit=No, Sense=No, SMD=Yes, Socket=No, Status="Not Recommended", TC=±100ppm/°C
R3 R12: library part R0402_330R_1%_0.0625W_100PPM, "Resistor - 1%", Case=0402, Manufacturer=GENERIC, Manufacturer1 ComponentHeight=0.4mm, Manufacturer1 Example="YAGEO PHYCOMP", Manufacturer1 Part Number=232270673301L, Power=0.0625W, Tolerance=±1%, Author="CERN DEM JLC", Component Type=Standard, CreateDate=03.12.2007, HelpURL=\\cern.ch\dfs\Applications\Altium\Datasheets\R0402_Phycomp_RC0402.pdf, LatestRevisionDate=17.10.2012, Manufacturer Part Number=R0402_330R_1%_0.0625W_100PPM, Mounted=Yes, Part Description="General Purpose Thick Film Chip Resistor", Part Number=R0402_330R_1%_0.0625W_100PPM, Pin Count=2, PressFit=No, Sense=No, SMD=Yes, Socket=No, Status="Not Recommended", TC=±100ppm/°C
R4: library part R0603_33k_1%_0.1W_100PPM, "Resistor - 1%", Case=0603, Manufacturer=GENERIC, Manufacturer1 ComponentHeight=0.55mm, Manufacturer1 Example="NIC COMPONENT", Manufacturer1 Part Number=NRC06F3302TRF, Manufacturer Part Number=R0603_33K_1%_0.1W_100PPM, Power=0.1W, Tolerance=±1%, Author="CERN DEM JLC", Component Type=Standard, CreateDate=03/12/2007, HelpURL=\\cern.ch\dfs\Applications\Altium\Datasheets\R0603_NIC_NRC.pdf, LatestRevisionDate=13/03/2008, Mounted=Yes, Part Description="General Purpose Thick Film Chip Resistor", Part Number=R0603_33K_1%_0.1W_100PPM, Pin Count=2, PressFit=No, Sense=No, SMD=Yes, Socket=No, Status=Preferred, TC=±100ppm/°C
R5: library part R0402_1K6_1%_0.0625W_100PPM, "Resistor - 1%", Case=0402, Manufacturer=GENERIC, Manufacturer1 ComponentHeight=0.4mm, Manufacturer1 Example="YAGEO PHYCOMP", Manufacturer1 Part Number=232270671602L, Power=0.0625W, Tolerance=±1%, Author="CERN DEM JLC", Component Type=Standard, CreateDate=03/12/2007, HelpURL=\\cern.ch\dfs\Applications\Altium\Datasheets\R0402_Phycomp_RC0402.pdf, LatestRevisionDate=17/10/2012, Manufacturer Part Number=R0402_1K6_1%_0.0625W_100PPM, Mounted=Yes, Part Description="General Purpose Thick Film Chip Resistor", Part Number=R0402_1K6_1%_0.0625W_100PPM, Pin Count=2, PressFit=No, Sense=No, SMD=Yes, Socket=No, Status="Not Recommended", TC=±100ppm/°C
R6: library part R0402_22K_1%_0.0625W_100PPM, "Resistor - 1%", Case=0402, Manufacturer=GENERIC, Manufacturer1 ComponentHeight=0.4mm, Manufacturer1 Example="YAGEO PHYCOMP", Manufacturer1 Part Number=232270672203L, Power=0.0625W, Tolerance=±1%, Author="CERN DEM JLC", Component Type=Standard, CreateDate=03.12.2007, HelpURL=\\cern.ch\dfs\Applications\Altium\Datasheets\R0402_Phycomp_RC0402.pdf, LatestRevisionDate=17.10.2012, Manufacturer Part Number=R0402_22K_1%_0.0625W_100PPM, Mounted=Yes, Part Description="General Purpose Thick Film Chip Resistor", Part Number=R0402_22K_1%_0.0625W_100PPM, Pin Count=2, PressFit=No, Sense=No, SMD=Yes, Socket=No, Status="Not Recommended", TC=±100ppm/°C
R7: library part R0402_100R_1%_0.0625W_100PPM, "Resistor - 1%", Case=0402, Manufacturer=GENERIC, Manufacturer1 ComponentHeight=0.4mm, Manufacturer1 Example="YAGEO PHYCOMP", Manufacturer1 Part Number=232270671001L, Power=0.0625W, Tolerance=±1%, Author="CERN DEM JLC", Component Type=Standard, CreateDate=03.12.2007, HelpURL=\\cern.ch\dfs\Applications\Altium\Datasheets\R0402_Phycomp_RC0402.pdf, LatestRevisionDate=17.10.2012, Manufacturer Part Number=R0402_100R_1%_0.0625W_100PPM, Mounted=Yes, Part Description="General Purpose Thick Film Chip Resistor", Part Number=R0402_100R_1%_0.0625W_100PPM, Pin Count=2, PressFit=No, Sense=No, SMD=Yes, Socket=No, Status="Not Recommended", TC=±100ppm/°C
R8 R9: library part R0402_100K_1%_0.0625W_100PPM, "Resistor - 1%", Case=0402, Manufacturer=GENERIC, Manufacturer1 ComponentHeight=0.4mm, Manufacturer1 Example="YAGEO PHYCOMP", Manufacturer1 Part Number=232270671004L, Power=0.0625W, Tolerance=±1%, Author="CERN DEM JLC", Component Type=Standard, CreateDate=03/12/2007, HelpURL=\\cern.ch\dfs\Applications\Altium\Datasheets\R0402_Phycomp_RC0402.pdf, LatestRevisionDate=17/10/2012, Manufacturer Part Number=R0402_100K_1%_0.0625W_100PPM, Mounted=Yes, Part Description="General Purpose Thick Film Chip Resistor", Part Number=R0402_100K_1%_0.0625W_100PPM, Pin Count=2, PressFit=No, Sense=No, SMD=Yes, Socket=No, Status="Not Recommended", TC=±100ppm/°C
R10 R20 R21 R23: library part R0402_2K4_1%_0.0625W_100PPM, "Resistor - 1%", Case=0402, Manufacturer=GENERIC, Manufacturer1 ComponentHeight=0.4mm, Manufacturer1 Example="YAGEO PHYCOMP", Manufacturer1 Part Number=232270672402L, Power=0.0625W, Tolerance=±1%, Author="CERN DEM JLC", Component Type=Standard, CreateDate=03/12/2007, HelpURL=\\cern.ch\dfs\Applications\Altium\Datasheets\R0402_Phycomp_RC0402.pdf, LatestRevisionDate=17/10/2012, Manufacturer Part Number=R0402_2K4_1%_0.0625W_100PPM, Mounted=Yes, Part Description="General Purpose Thick Film Chip Resistor", Part Number=R0402_2K4_1%_0.0625W_100PPM, Pin Count=2, PressFit=No, Sense=No, SMD=Yes, Socket=No, Status="Not Recommended", TC=±100ppm/°C
R11 R128: library part R0402_10K_1%_0.0625W_100PPM, "Resistor - 1%", Case=0402, Manufacturer=GENERIC, Manufacturer1 ComponentHeight=0.4mm, Manufacturer1 Example="YAGEO PHYCOMP", Manufacturer1 Part Number=232270671003L, Power=0.0625W, Tolerance=±1%, Author="CERN DEM JLC", Component Type=Standard, CreateDate=03.12.2007, HelpURL=\\cern.ch\dfs\Applications\Altium\Datasheets\R0402_Phycomp_RC0402.pdf, LatestRevisionDate=17.10.2012, Manufacturer Part Number=R0402_10K_1%_0.0625W_100PPM, Mounted=Yes, Part Description="General Purpose Thick Film Chip Resistor", Part Number=R0402_10K_1%_0.0625W_100PPM, Pin Count=2, PressFit=No, Sense=No, SMD=Yes, Socket=No, Status="Not Recommended", TC=±100ppm/°C
R13 R136: library part R0402_43K_1%_0.0625W_100PPM, "Resistor - 1%", Case=0402, Manufacturer=GENERIC, Manufacturer1 ComponentHeight=0.4mm, Manufacturer1 Example="YAGEO PHYCOMP", Manufacturer1 Part Number=232270674303L, Power=0.0625W, Tolerance=±1%, Author="CERN DEM JLC", Component Type=Standard, CreateDate=03/12/2007, HelpURL=\\cern.ch\dfs\Applications\Altium\Datasheets\R0402_Phycomp_RC0402.pdf, LatestRevisionDate=17/10/2012, Manufacturer Part Number=R0402_43K_1%_0.0625W_100PPM, Mounted=Yes, Part Description="General Purpose Thick Film Chip Resistor", Part Number=R0402_43K_1%_0.0625W_100PPM, Pin Count=2, PressFit=No, Sense=No, SMD=Yes, Socket=No, Status="Not Recommended", TC=±100ppm/°C
R14: library part R0603_18k_1%_0.1W_100PPM, "Resistor - 1%", Case=0603, Manufacturer=GENERIC, Manufacturer1 ComponentHeight=0.55mm, Manufacturer1 Example="NIC COMPONENT", Manufacturer1 Part Number=NRC06F1802TRF, Manufacturer Part Number=R0603_18K_1%_0.1W_100PPM, Power=0.1W, Tolerance=±1%, Author="CERN DEM JLC", Component Type=Standard, CreateDate=03/12/2007, HelpURL=\\cern.ch\dfs\Applications\Altium\Datasheets\R0603_NIC_NRC.pdf, LatestRevisionDate=13/03/2008, Mounted=Yes, Part Description="General Purpose Thick Film Chip Resistor", Part Number=R0603_18K_1%_0.1W_100PPM, Pin Count=2, PressFit=No, Sense=No, SMD=Yes, Socket=No, Status=Preferred, TC=±100ppm/°C
R15: library part R0402_47K_1%_0.0625W_100PPM, "Resistor - 1%", Case=0402, Manufacturer=GENERIC, Manufacturer1 ComponentHeight=0.4mm, Manufacturer1 Example="YAGEO PHYCOMP", Manufacturer1 Part Number=232270674703L, Power=0.0625W, Tolerance=±1%, Author="CERN DEM JLC", Component Type=Standard, CreateDate=03.12.2007, HelpURL=\\cern.ch\dfs\Applications\Altium\Datasheets\R0402_Phycomp_RC0402.pdf, LatestRevisionDate=17.10.2012, Manufacturer Part Number=R0402_47K_1%_0.0625W_100PPM, Mounted=Yes, Part Description="General Purpose Thick Film Chip Resistor", Part Number=R0402_47K_1%_0.0625W_100PPM, Pin Count=2, PressFit=No, Sense=No, SMD=Yes, Socket=No, Status="Not Recommended", TC=±100ppm/°C
R16: library part R0402_5K6_1%_0.0625W_100PPM, "Resistor - 1%", Case=0402, Manufacturer=GENERIC, Manufacturer1 ComponentHeight=0.4mm, Manufacturer1 Example="YAGEO PHYCOMP", Manufacturer1 Part Number=232270675602L, Power=0.0625W, Tolerance=±1%, Author="CERN DEM JLC", Component Type=Standard, CreateDate=03/12/2007, HelpURL=\\cern.ch\dfs\Applications\Altium\Datasheets\R0402_Phycomp_RC0402.pdf, LatestRevisionDate=17/10/2012, Manufacturer Part Number=R0402_5K6_1%_0.0625W_100PPM, Mounted=Yes, Part Description="General Purpose Thick Film Chip Resistor", Part Number=R0402_5K6_1%_0.0625W_100PPM, Pin Count=2, PressFit=No, Sense=No, SMD=Yes, Socket=No, Status="Not Recommended", TC=±100ppm/°C
R17: library part R0402_10k_1%_0.0625W_100PPM, "Resistor - 1%", Case=0402, Manufacturer=GENERIC, Manufacturer1 ComponentHeight=0.4mm, Manufacturer1 Example="YAGEO PHYCOMP", Manufacturer1 Part Number=232270671003L, Manufacturer Part Number=R0402_10K_1%_0.0625W_100PPM, Power=0.0625W, Tolerance=±1%, Author="CERN DEM JLC", Component Type=Standard, CreateDate=03.12.2007, HelpURL=\\cern.ch\dfs\Applications\Altium\Datasheets\R0402_Phycomp_RC0402.pdf, LatestRevisionDate=17.10.2012, Mounted=Yes, Part Description="General Purpose Thick Film Chip Resistor", Part Number=R0402_10K_1%_0.0625W_100PPM, Pin Count=2, PressFit=No, Sense=No, SMD=Yes, Socket=No, Status="Not Recommended", TC=±100ppm/°C
R18: library part R0603_30k_1%_0.1W_100PPM, "Resistor - 1%", Case=0603, Manufacturer=GENERIC, Manufacturer1 ComponentHeight=0.55mm, Manufacturer1 Example="NIC COMPONENT", Manufacturer1 Part Number=NRC06F3002TRF, Manufacturer Part Number=R0603_30K_1%_0.1W_100PPM, Power=0.1W, Tolerance=±1%, Author="CERN DEM JLC", Component Type=Standard, CreateDate=03/12/2007, HelpURL=\\cern.ch\dfs\Applications\Altium\Datasheets\R0603_NIC_NRC.pdf, LatestRevisionDate=13/03/2008, Mounted=Yes, Part Description="General Purpose Thick Film Chip Resistor", Part Number=R0603_30K_1%_0.1W_100PPM, Pin Count=2, PressFit=No, Sense=No, SMD=Yes, Socket=No, Status=Preferred, TC=±100ppm/°C
R19 R24: library part R0402_27K_1%_0.0625W_100PPM, "Resistor - 1%", Case=0402, Manufacturer=GENERIC, Manufacturer1 ComponentHeight=0.4mm, Manufacturer1 Example="YAGEO PHYCOMP", Manufacturer1 Part Number=232270672703L, Power=0.0625W, Tolerance=±1%, Author="CERN DEM JLC", Component Type=Standard, CreateDate=03/12/2007, HelpURL=\\cern.ch\dfs\Applications\Altium\Datasheets\R0402_Phycomp_RC0402.pdf, LatestRevisionDate=17/10/2012, Manufacturer Part Number=R0402_27K_1%_0.0625W_100PPM, Mounted=Yes, Part Description="General Purpose Thick Film Chip Resistor", Part Number=R0402_27K_1%_0.0625W_100PPM, Pin Count=2, PressFit=No, Sense=No, SMD=Yes, Socket=No, Status="Not Recommended", TC=±100ppm/°C
R125: library part R0603_11K8_0.1%_0.063W_10PPM, "Resistor - 0.1%", Case=0603, Manufacturer=GENERIC, Manufacturer1 ComponentHeight=0.5mm, Manufacturer1 Example="TYCO HOLSWORTHY", Manufacturer1 Part Number=RN73C1J11K8BTDF, Power=0.063W, Tolerance=±0.1%, Author="CERN DEM JLC", Component Type=Standard, CreateDate=03.12.2007, HelpURL=\\cern.ch\dfs\Applications\Altium\Datasheets\R0603_Tyco_RN73.pdf, LatestRevisionDate=13.03.2008, Manufacturer Part Number=R0603_11K8_0.1%_0.063W_10PPM, Mounted=Yes, Part Description="Thin Film Chip Resistor", Part Number=R0603_11K8_0.1%_0.063W_10PPM, Pin Count=2, Sense=No, SMD=Yes, Socket=No, Status="Not recommended", TC=±10ppm
R126: library part R0603_5K62_0.1%_0.063W_10PPM, "Resistor - 0.1%", Case=0603, Manufacturer=GENERIC, Manufacturer1 ComponentHeight=0.5mm, Manufacturer1 Example="TYCO HOLSWORTHY", Manufacturer1 Part Number=RN73C1J5K62BTDF, Power=0.063W, Tolerance=±0.1%, Author="CERN DEM JLC", Component Type=Standard, CreateDate=03.12.2007, HelpURL=\\cern.ch\dfs\Applications\Altium\Datasheets\R0603_Tyco_RN73.pdf, LatestRevisionDate=13.03.2008, Manufacturer Part Number=R0603_5K62_0.1%_0.063W_10PPM, Mounted=Yes, Part Description="Thin Film Chip Resistor", Part Number=R0603_5K62_0.1%_0.063W_10PPM, Pin Count=2, Sense=No, SMD=Yes, Socket=No, Status="Not recommended", TC=±10ppm
R127: library part R0603_1K78_0.1%_0.063W_10PPM, "Resistor - 0.1%", Case=0603, Manufacturer=GENERIC, Manufacturer1 ComponentHeight=0.5mm, Manufacturer1 Example="TYCO HOLSWORTHY", Manufacturer1 Part Number=RN73C1J1K78BTDF, Power=0.063W, Tolerance=±0.1%, Author="CERN DEM JLC", Component Type=Standard, CreateDate=03.12.2007, HelpURL=\\cern.ch\dfs\Applications\Altium\Datasheets\R0603_Tyco_RN73.pdf, LatestRevisionDate=13.03.2008, Manufacturer Part Number=R0603_1K78_0.1%_0.063W_10PPM, Mounted=Yes, Part Description="Thin Film Chip Resistor", Part Number=R0603_1K78_0.1%_0.063W_10PPM, Pin Count=2, Sense=No, SMD=Yes, Socket=No, Status="Not recommended", TC=±10ppm
R129: library part R0402_200K_1%_0.0625W_100PPM, "Resistor - 1%", Case=0402, Manufacturer=GENERIC, Manufacturer1 ComponentHeight=0.4mm, Manufacturer1 Example="YAGEO PHYCOMP", Manufacturer1 Part Number=232270672004L, Power=0.0625W, Tolerance=±1%, Author="CERN DEM JLC", Component Type=Standard, CreateDate=03.12.2007, HelpURL=\\cern.ch\dfs\Applications\Altium\Datasheets\R0402_Phycomp_RC0402.pdf, LatestRevisionDate=17.10.2012, Manufacturer Part Number=R0402_200K_1%_0.0625W_100PPM, Mounted=Yes, Part Description="General Purpose Thick Film Chip Resistor", Part Number=R0402_200K_1%_0.0625W_100PPM, Pin Count=2, Sense=No, SMD=Yes, Socket=No, Status="Not recommended", TC=±100ppm/°C
R130: library part R0402_51K_1%_0.0625W_100PPM, "Resistor - 1%", Case=0402, Manufacturer=GENERIC, Manufacturer1 ComponentHeight=0.4mm, Manufacturer1 Example="YAGEO PHYCOMP", Manufacturer1 Part Number=232270675103L, Power=0.0625W, Tolerance=±1%, Author="CERN DEM JLC", Component Type=Standard, CreateDate=03.12.2007, HelpURL=\\cern.ch\dfs\Applications\Altium\Datasheets\R0402_Phycomp_RC0402.pdf, LatestRevisionDate=17.10.2012, Manufacturer Part Number=R0402_51K_1%_0.0625W_100PPM, Mounted=Yes, Part Description="General Purpose Thick Film Chip Resistor", Part Number=R0402_51K_1%_0.0625W_100PPM, Pin Count=2, PressFit=No, Sense=No, SMD=Yes, Socket=No, Status="Not Recommended", TC=±100ppm/°C